# Altium PCB PCB2.PcbDoc
Units mil, origin at the board's own origin, x right, y up, seen from the top; angles counter-clockwise.
Board outline 1336.47 x 760 mil, 2 copper layers (Top Layer, Bottom Layer); 15 components, 8 nets, 36 pads, 18 vias.
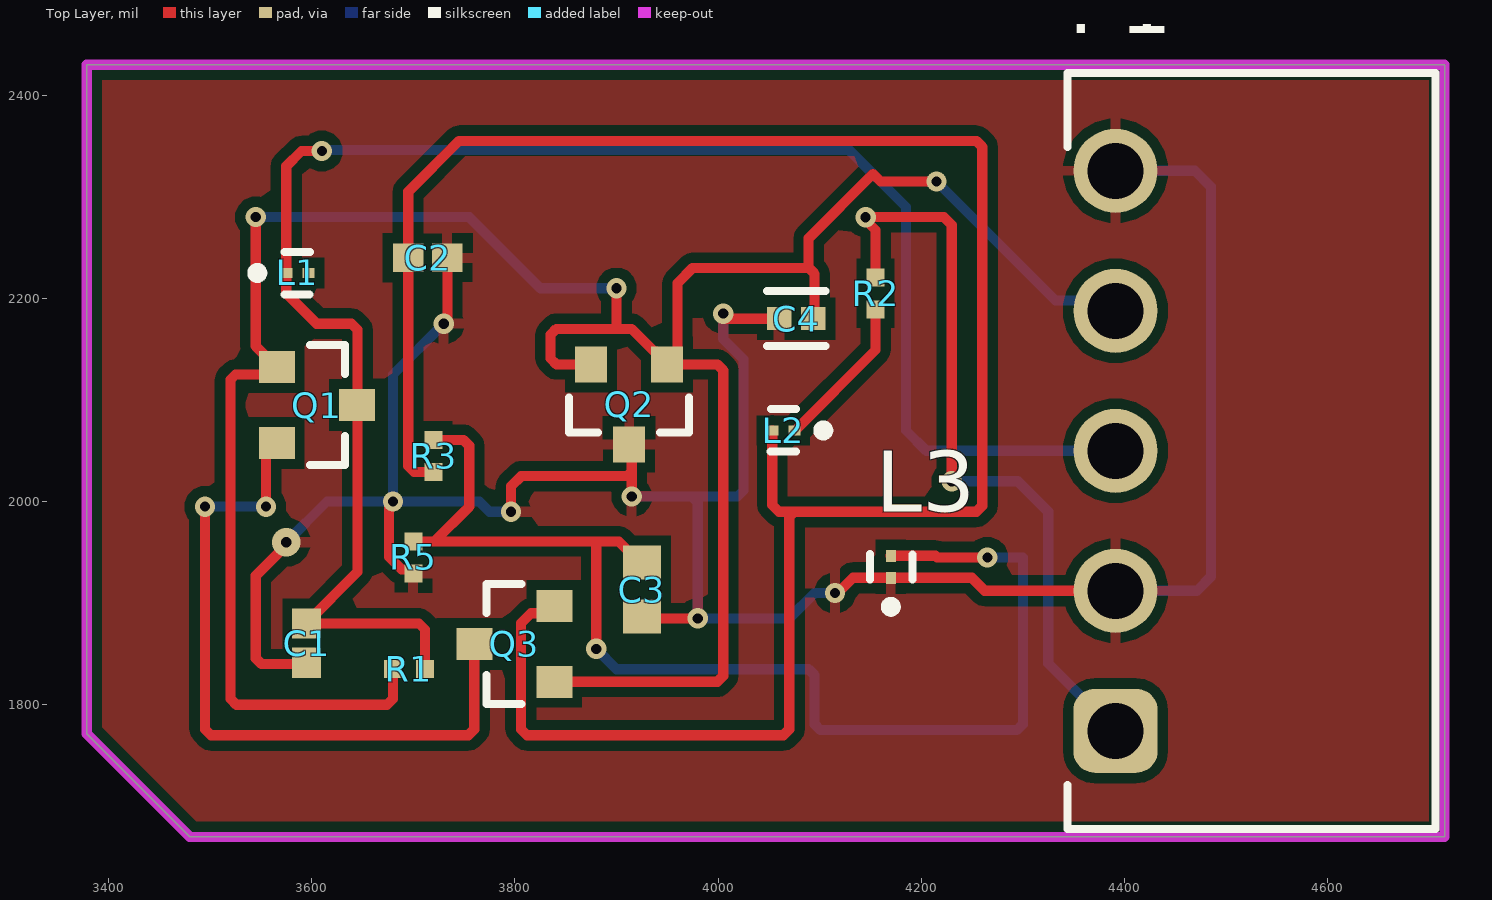
[diagram p0: Top Layer view]
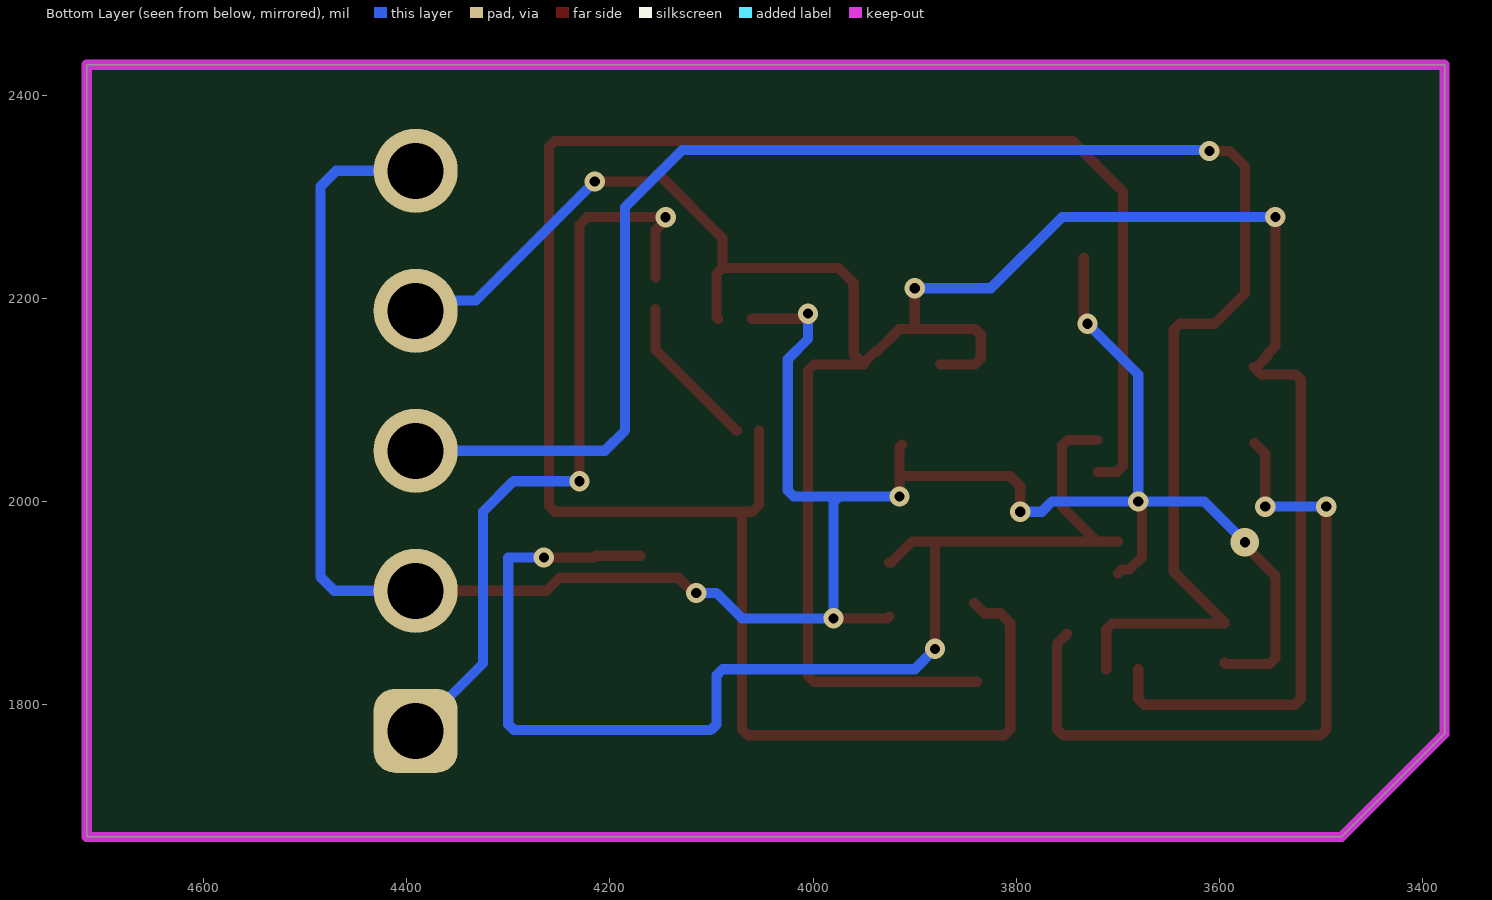
[diagram p1: Bottom Layer view, seen from below]
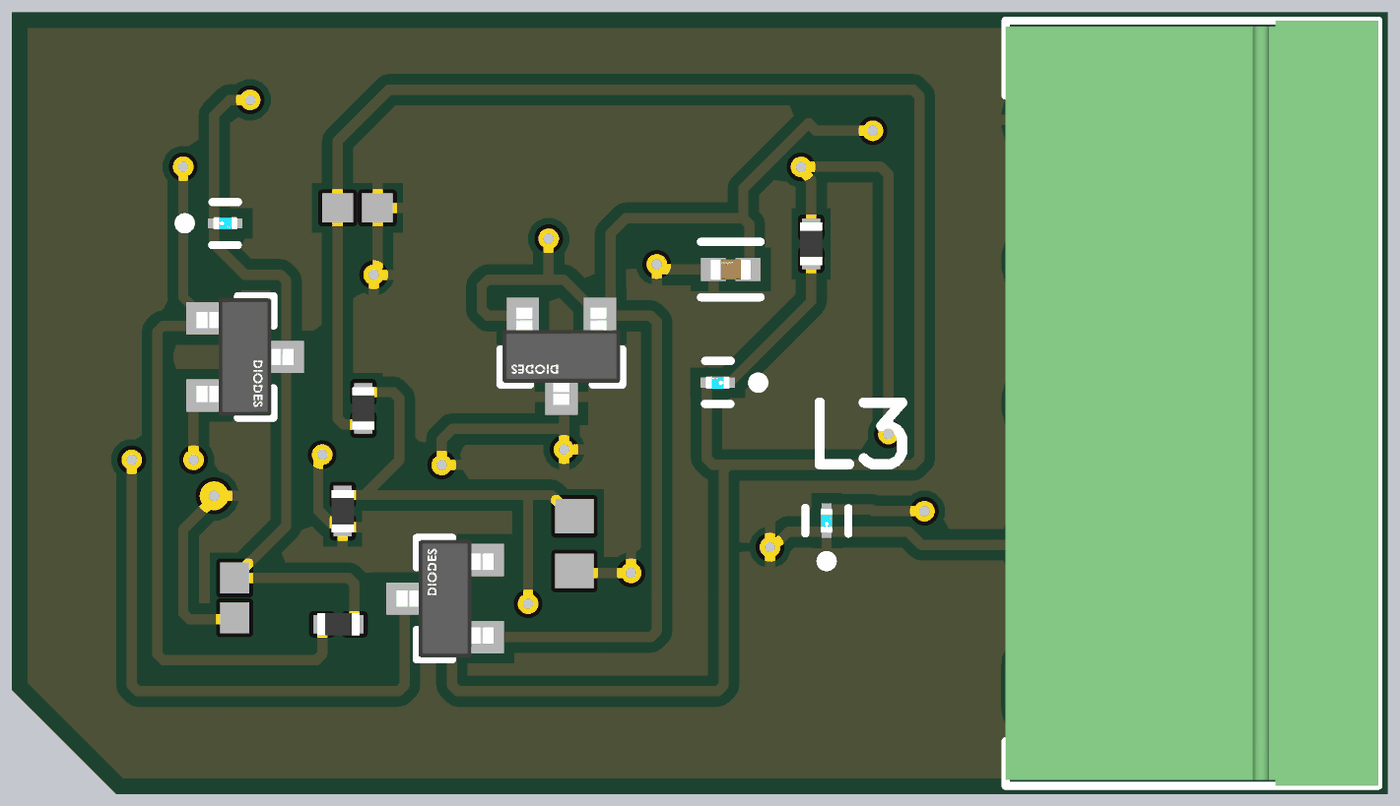
[diagram p2: 3D render of the assembled board from above, using the file's embedded part models]

## Layer stack, top to bottom
Top Solder: solder mask 0.4, Solder Resist, Dk 3.5
Top Layer: signal copper 1.4
Dielectric 1: dielectric 12.6, FR-4, Dk 4.8
Bottom Layer: signal copper 1.4
Bottom Solder: solder mask 0.4, Solder Resist, Dk 3.5

## Board outline
3378.53,1771.47 3378.53,2430 4715,2430 4715,1670 3480,1670

## Design rules (kind name [scope] priority, off if disabled: settings)
Clearance [All] p1: gap=10 ignorepadtopadclearanceinfootprint=TRUE
PolygonConnect [All] p1: connectstyle=Relief reliefconductorwidth=10 reliefentries=4 polygonreliefangle="90 Angle" airgapwidth=10
RoutingVias [All] p1: holewidth=28 width=50 viastyle="Through Hole" minholewidth=28 minwidth=50 maxholewidth=28 maxwidth=50
SolderMaskExpansion [All] p1: expansion=4 istentingtop=FALSE
SupplyNets "Schematic Supply Nets" [InNet('GND')] p1: voltage=0.000
Width [All] p1: maxlimit=10 minlimit=10 preferedwidth=10
30 further rules are at their usual default settings.

## Components (designator, comment, footprint, x,y, rotation, side; value= is the part's Value field where it differs from the comment)
C1 "40f" CAPC1005X55X25ML05T10 3595,1860.71 r90 top
C2 "550f" CAPC1005X55X25ML05T10 3714.29,2240 r180 top
C3 "50f" CAPC1608X90X35NL10T15 3925,1913.43 r90 top
C4 "1p" FP-GJM155-0_05-IPC_B 4076.87,2180 r180 top
L1 "41n" FP-LQP03TG_02-MFG 3585.83,2225 r0 top
L2 "6.3n" FP-LQP03TG_02-MFG 4064.17,2070 r180 top
L3 "26.3n" FP-LQP03TG_02-MFG 4170,1935.83 r90 top
P1 "691322110005" 691322110005 4525,2050 r90 top
Q1 "2N7002-7-F" FP-SOT23-MFG 3605,2095 r0 top
Q2 "2N7002-7-F" FP-SOT23-MFG 3912.4,2095.63 r270 top
Q3 "2N7002-7-F" FP-SOT23-MFG 3799.37,1860 r180 top
R1 "6.3K" RESC1005X40X25LL05T05 3695.75,1835 r180 top
R2 "50" RESC1005X40X25LL05T05 4155,2205 r270 top
R3 "1.5" RESC1005X40X25LL05T05 3720,2045 r90 top
R5 "3.98K" RESC1005X40X25LL05T05 3700,1945 r90 top

## Footprints (in the part's own frame and the unit in brackets; to place one, negate y for a bottom-side part, rotate by r counter-clockwise, add the part's x,y. Pads: shape width x height; smd on the part's side, far side on the other; paste and mask are expansions set on the pad)
691322110005 [mm] "Horizontal PCB Header, pitch 3.5mm, 05p"
  rrect50% 2.1x2.1 hole 1.4: 1(-7,3.4)
  round 2.1 hole 1.4: 2(-3.5,3.4) 3(0,3.4) 4(3.5,3.4) 5(7,3.4)
  silkscreen extent -9.45,-4.6 9.45,4.6, body extent -9.45,-4.6 9.45,4.6, height 7.3
CAPC1005X55X25ML05T10 [mm] "Chip Capacitor, 2-Leads, Body 1.00x0.50mm, IPC Low Density"
  rect 0.76x0.72 smd: 1(-0.49,0) 2(0.49,0)
  body extent -0.53,-0.28 0.53,0.27, height 0.55
CAPC1608X90X35NL10T15 [mm] "Chip Capacitor, 2-Leads, Body 1.60x0.80mm, IPC Medium Density"
  rect 0.85x0.95 smd: 1(-0.675,0) 2(0.675,0)
  body extent -0.85,-0.45 0.85,0.45, height 0.9
FP-GJM155-0_05-IPC_B [mil]
  rect 24.23x22.54 smd paste+0 mask+0: 1(-16.87,0) 2(16.87,0)
  silkscreen extent -29,-27 29,27, body extent -35,-17 35,17, height 10
FP-LQP03TG_02-MFG [mm]
  rect 0.3x0.25 smd paste+0 mask+0: 1(-0.275,0) 2(0.275,0)
  silkscreen extent -1.12,-0.54 0.32,0.53, body extent -0.53,-0.27 0.53,0.27, height 0.25
FP-SOT23-MFG [mm]
  rect 0.9x0.8 smd paste+0 mask+0: 1(-1,0.95) 2(-1,-0.95) 3(1,0)
  silkscreen extent -0.18,-1.5 0.7,1.5, body extent -1.55,-1.6 1.55,1.6, height 0.25
RESC1005X40X25LL05T05 [mm] "Chip Resistor, 2-Leads, Body 1.05x0.55mm, IPC High Density"
  rect 0.45x0.45 smd: 1(-0.4,0) 2(0.4,0)
  body extent -0.53,-0.28 0.53,0.28, height 0.4

## Part data
C1 C2: library part CMP-2008-04284-1, Manufacturer=Murata, Part Number=GRM1555C1H1R3CA01D
C3: library part CMP-2006-02422-1, Manufacturer=Murata, Part Number=GQM1885C1H120JB01D
C4: library part CMP-2008-03808-2, "Multi-Layer Ceramic Capacitor 1pF C0G  ±0.1pF 0402 Paper T/R", Capacitance=1pF, Case Code (Imperial)=0402, Case Code (Metric)=1005, Dielectric=C0G, Max Operating Temperature=125°C, Min Operating Temperature=-55°C, Package Quantity=10000, Temperature Coefficient=30ppm/°C, Voltage=50V, Case/Package=0402, Depth=0.5mm, Height=0.5mm, Lead Free="Lead Free", Lead Pitch=0.3mm, Length=1mm, Mount="Surface Mount", Number of Pins=2, Packaging="Tape and Reel", Radiation Hardening=No, REACH SVHC="No SVHC", Termination=SMD/SMT, Thickness=0.022inch, Voltage Rating=50V, Voltage Rating (DC)=50V, Width=0.02inch
L1 L2 L3: library part CMP-06042-014154-1, "Film type RF Inductor 3.3nH ±0.1nH 450mA 0.25Ω 0201 (0603)", Case Code (Imperial)=0201, Case Code (Metric)=0603, Current=300mA, Current Rating=450mA, DC Resistance (DCR)=250mR, Inductance=3.3nH, Max Operating Temperature=125°C, Min Operating Temperature=-55°C, Package Quantity=15000, Resistor Type="Thin Film", Self Resonant Frequency=8GHz, Test Frequency=500MHz, Tolerance=3%, Case/Package=0201, Core Material=Non-Magnetic, DC Current=450mA, Depth=0.33mm, Height=0.012inch, Height - Seated (Max)=0.013inch, Lead Free="Lead Free", Length=0.024inch, Max DC Current=450mA, Military Standard=Not, Mount="Surface Mount", Packaging="Tape and Reel", Q Factor=14, Radiation Hardening=No, Shielding=Unshielded, Termination=SMD/SMT, Width=0.012inch
P1: library part CMP-1502-01794-2, Color=Green, Current=10A, Voltage=300V, Contact Gender=Male, Contact Material=Brass, Gender=Male, Height=9.2mm, Lead Pitch=3.5mm, Length=10.5mm, Mount="Through Hole", NexarPartId=18818349, Number Of Contacts=5, Number of Levels=1, Number of Pins=5, Number of Positions Per Level=5, Number Of Rows=1, Packaging=Box, Pitch=3.5052mm, REACH SVHC=Unknown, RoHS=Compliant, Termination=Solder, Width=18.6mm
Q1 Q2 Q3: library part CMP-2000-04929-2, "MOSFET N-CH 60V 115MA SOT23-3", Case/Package=SOT-23, Continuous Drain Current (ID)=115mA, Drain to Source Breakdown Voltage=70V, Drain to Source Resistance=7.5R, Drain to Source Voltage (Vdss)=60V, Gate to Source Voltage (Vgs)=20V, Input Capacitance=50pF, Max Operating Temperature=150°C, Max Power Dissipation=300mW, Min Operating Temperature=-55°C, Package Quantity=3000, Power Dissipation=540mW, Threshold Voltage=2.5V, Contact Plating=Tin, Current Rating=115mA, Dual Supply Voltage=60V, Element Configuration=Single, Fall Time=5.6ns, Height=1mm, Lead Free="Lead Free", Length=2.9mm, Mount="Surface Mount", Nominal Vgs=2.5V, Number of Channels=1, Number of Elements=1, Number of Pins=3, On-State Resistance=7.5R, Packaging="Tape and Reel", Radiation Hardening=No, Rds On Max=7.5R, REACH SVHC="No SVHC", Rise Time=3ns, Termination=SMD/SMT, Turn-Off Delay Time=11ns, Turn-On Delay Time=7ns, Voltage=60V, Voltage Rating (DC)=60V, Weight=0.000282oz, Width=1.3mm
R1 R2 R3 R5: library part CMP-2000-07451-1, "Chip Resistor, 0 Ohm, 0.1 W, -55 to 155 degC, 0402 (1005 Metric), RoHS, Tape and Reel", Case Code (Imperial)=0402, Case Code (Metric)=1005, Manufacturer=Panasonic, Max Operating Temperature=155degC, Max Power Dissipation=100mW, Min Operating Temperature=-55degC, Package Description="2-Pin Surface Mount Device, Body 1 x 0.5 mm", Package Quantity=1, Package Reference=402, Resistance=0mOhm, Temperature Coefficient=600ppm/��C, Tolerance=5%, Voltage Rating=50V, Case/Package=0402, Composition=ThickFilm, Contact Plating=Tin, Datasheet URL=https://industrial.panasonic.com/cdbs/www-data/pdf/RDA0000/AOA0000C301.pdf, Datasheet Version=03/2015, Depth=0.5mm, Height=0.35mm, Lead Free=LeadFree, Length=1mm, Manufacturer URL=http://www.panasonic.com/, Military Standard=Not, Mount=SurfaceMount, Mounting Technology=SurfaceMount, Number of Terminations=2, Packaging=TapeandReel, Power Rating=100mW, Radiation Hardening=No, REACH SVHC=NoSVHC, RoHSCompliant=True, Termination=SMD/SMT, Voltage Rating (DC)=50V, Width=0.02inch

## Via types
v1: diameter 20, hole 10, Top Layer to Bottom Layer, 17 vias
v2: diameter 28, hole 10, Top Layer to Bottom Layer, 1 vias

## Nets (pads, with @x,y where several pads share a name; then routed paths per layer and width w, separated by ;. In a path a pad name is that pad's centre, name@x,y a point inside that pad or via, vN(x,y) a via of type N, cw(c..) or ccw(c..) an arc to the next point about the centre after c; other vN are vias at no path point)
GND: C1.1 C2.1 C3.1 C4.2 L3.1 P1.2 P1.5 Q2.3 R5.1 | length 2519.4
  Top Layer w10: v2(3575,1960) 3575,1956.92 3545,1926.92 3545,1845.86 3550.86,1840 3593.58,1840 C1.1 ; v1(3680,2000) 3680,1997.29 3676.14,1993.44 3676.14,1945.68 3688.71,1933.11 3696.14,1933.11 R5.1 ; v1(3730,2175) 3730,2177.71 3733.58,2181.29 C2.1 ; v1(3796.1,1990) 3796.1,2015 3806.1,2025 3910.67,2025 3915,2029.33 ; Q2.3 3915,2053.66 3915,2029.33 ; v1(3915,2005) 3915,2029.33 ; C3.1 3926.85,1885 v1(3980,1885) ; v1(4005,2185) 4010,2180 C4.2 ; v1(4115,1910) 4117.71,1910 4132.71,1925 L3.1 4249.64,1925 4262.44,1912.2 P1.2
  Bottom Layer w10: v2(3575,1960) 3615,2000 v1(3680,2000) ; v1(3730,2175) 3680,2125 v1(3680,2000) ; v1(3796.1,1990) 3775,1990 3765,2000 v1(3680,2000) ; v1(3915,2005) 3974.14,2005 ; v1(4005,2185) 4005,2160 4025,2140 4025,2010.86 4019.14,2005 3974.14,2005 ; v1(4115,1910) 4095,1910 4070,1885 v1(3980,1885) 3980,1999.14 3974.14,2005 ; P1.2 4471.35,1912.2 4485,1925.86 4485,2310 4469.41,2325.59 P1.5
NetC1_2: C1.2 L1.1 P1.3 Q1.3 R1.1 | length 1751.2
  Top Layer w10: C1.2 3705.64,1880 3711.5,1874.14 R1.1 ; C1.2@3595,1880.79 3645,1930.79 3645,2169.14 3639.14,2175 3605,2175 3575,2205 L1.1 3575,2330 3590,2345 v1(3610,2345)
  Bottom Layer w10: v1(3610,2345) 3610.91,2345.91 4129.09,2345.91 4185,2290 4185,2070 4205,2050 P1.3
NetC2_2: C2.2 L2.2 Q3.2 R3.1 | length 2156.9
  Top Layer w10: R3.1 3700.86,2029.25 3695,2035.11 C2.2 3695,2305 3745,2355 4254.14,2355 4260,2349.14 4260,1995.86 4254.14,1990 4075,1990 ; Q3.2@3841.44,1900.1 Q3.2 3831.34,1890 3815.86,1890 3806.02,1880.17 3806.02,1775.86 3811.88,1770 4064.14,1770 4070,1775.86 4070,1985 4075,1990 ; L2.2 4053.35,1996.65 4060,1990 4075,1990
NetC3_2: C3.2 L3.2 R3.2 R5.2 | length 1263.8
  Top Layer w10: R5.2 3720.75,1960.75 ; R3.2 3749.14,2060.75 3755,2054.89 3755,1995 3720.75,1960.75 ; v1(3880,1855) 3880,1960.75 ; C3.2 3923.03,1940 3902.28,1960.75 3880,1960.75 ; L3.2 4214.03,1946.65 4215.68,1945 v1(4265,1945) ; 3720.75,1960.75 3880,1960.75
  Bottom Layer w10: v1(3880,1855) 3900,1835 4089.14,1835 4095,1829.14 4095,1780.86 4100.86,1775 4294.14,1775 4300,1780.86 4300,1945 v1(4265,1945)
NetC4_1: C4.1 P1.4 Q1.1 Q2.1 Q2.2 Q3.1 R1.2 | length 2547.1
  Top Layer w10: v1(3545,2280) 3545,2153.03 3552.91,2145.12 3552.91,2143.15 3563.66,2132.4 Q1.1 ; Q1.1@3566.26,2132.4 3558.86,2125 3525,2125 3520,2120 3520,1805.86 3525.86,1800 3674.14,1800 3680,1805.86 R1.2 ; Q3.1 3999.14,1822.6 4005,1828.46 4005,2129.14 3999.14,2135 Q2.1 ; Q2.2 3840.86,2135 3835,2140.86 3835,2164.14 3840.86,2170 3900,2170 ; v1(3900,2210) 3900,2170 ; C4.1 4095,2181.25 4095,2224.14 4089.14,2230 ; v1(4215,2315) 4160,2315 4152.5,2322.5 4089.14,2259.14 4089.14,2230 ; 3900,2170 3914.8,2170 3937.09,2147.72 3939.06,2147.72 3949.8,2136.97 Q2.1 ; Q2.1 3960,2145.2 3960,2215 3975,2230 4089.14,2230
  Bottom Layer w10: v1@3550,2280 3755.08,2280 3825.08,2210 v1(3900,2210) ; v1(4215,2315) 4332.09,2197.91 4381.03,2197.91 P1.4
NetL2_1: L2.1 R2.2 | length 152.9
  Top Layer w10: L2.1 4075.83,2070 4155,2149.17 R2.2
NetP1_1: P1.1 R2.1 | length 754.2
  Top Layer w10: v1@4145,2279.82 4145,2280 4222.29,2280 4230,2272.29 v1(4230,2020) ; v1(4145.18,2279.82) 4145.18,2277.12 4155,2267.29 R2.1
  Bottom Layer w10: v1(4230,2020) 4295,2020 4325,1990 4325,1840.55 P1.1
NetQ1_2: Q1.2 Q3.3 | length 714.3
  Top Layer w10: v1(3495,1995) 3495,1775.86 3500.86,1770 3754.14,1770 3760,1775.86 Q3.3 Q3.3@3750,1870 ; v1(3555,1995) 3555,2046.97 Q1.2
  Bottom Layer w10: v1(3495,1995) v1(3555,1995)
pads on no net: L1.2

## Polygon pours and split planes (outlines as drawn)
GND on Top Layer "GND_L01_P000" (solid, pour order 0): 3380,2430 4715,2430 4715,1670 3480,1670 3380,1770

## Keep-outs
Keep-Out Layer:
  lines w10: 3378.53,1771.47 3378.53,1781.47 3378.53,2430 4715,2430 4715,1670 3480,1670 3378.53,1771.47